# Altium PCB PCB.PcbDoc
Units mm, origin at the board's own origin, x right, y up, seen from the top; angles counter-clockwise.
Board outline 35 x 30 mm, 2 copper layers (Top Layer, Bottom Layer), stack 1.07 mm thick; 14 components, 11 nets, 48 pads, 0 vias.
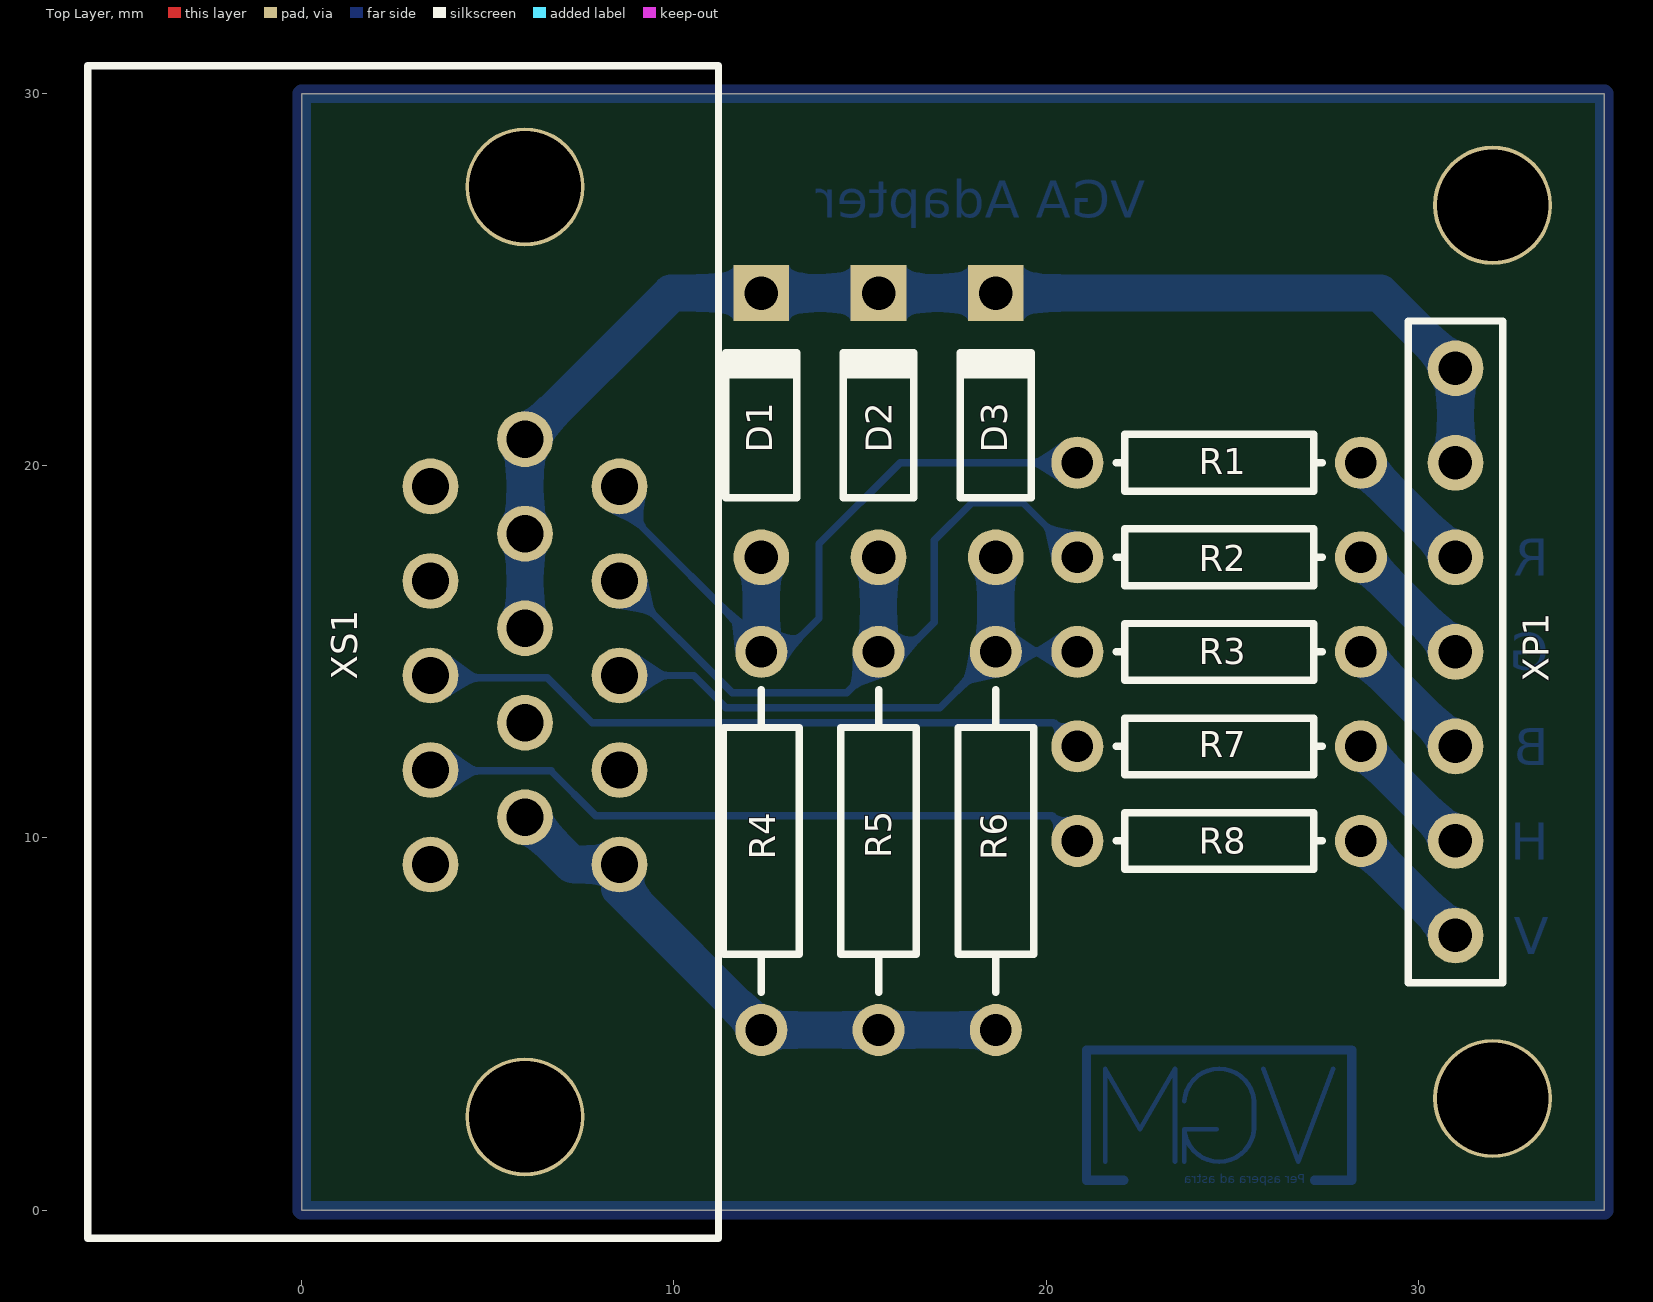
[diagram p0: Top Layer view]
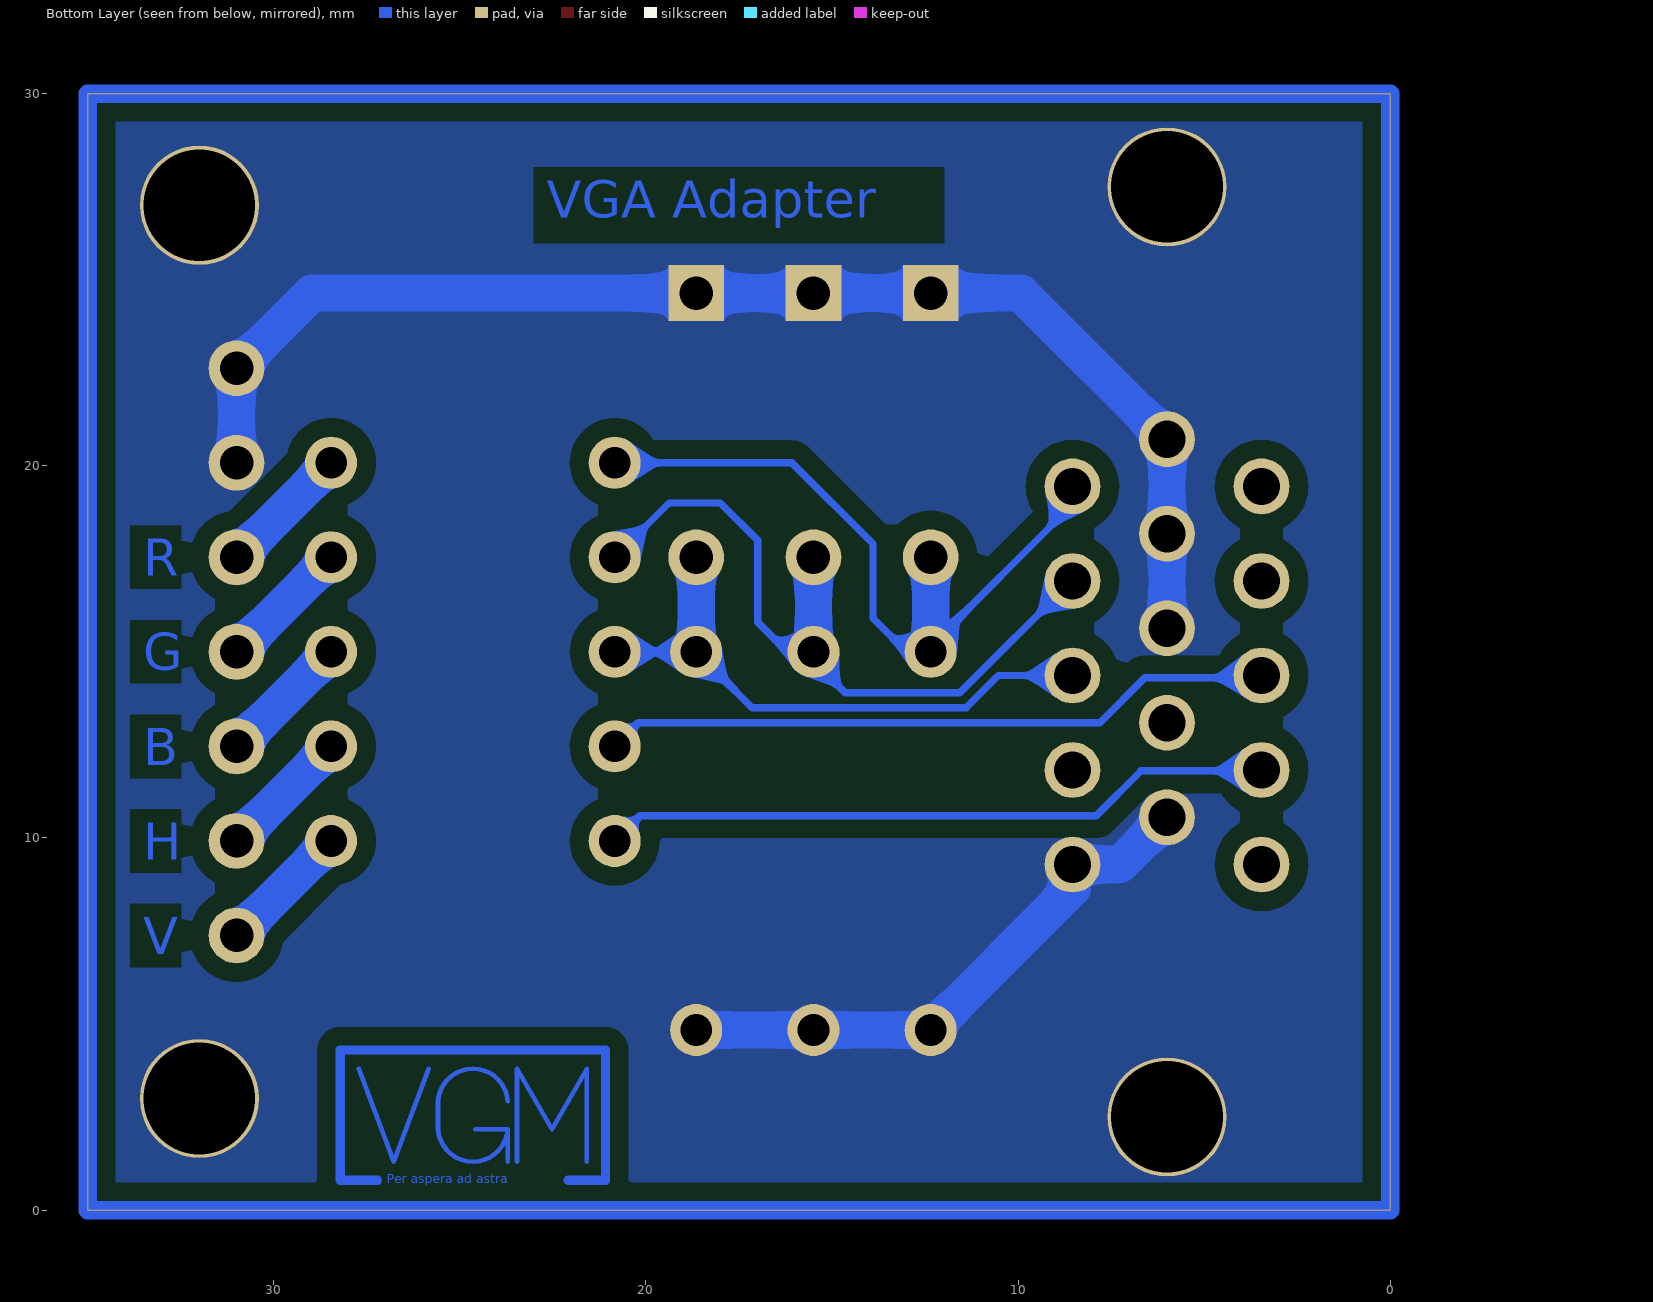
[diagram p1: Bottom Layer view, seen from below]

## Layer stack, top to bottom
Top Solder: solder mask 0.01, Solder Resist, Dk 3.5
Top Layer: signal copper 0.035
Dielectric 1: dielectric 1, FR-4, Dk 4.8
Bottom Layer: signal copper 0.035
Bottom Solder: solder mask 0.01, Solder Resist, Dk 3.5

## Board outline
0,0 35,0 35,30 0,30

## Design rules (kind name [scope] priority, off if disabled: settings)
Clearance [All] p1: gap=0.2 except(0.25: Track-THPad; 0.5: Poly-Poly THPad-Poly SMDPad-Poly Track-Poly Via-Poly Arc-Poly Fill-Poly)
PlaneClearance [All] p1: clearance=0.5
PolygonConnect [All] p1: connectstyle=Direct reliefconductorwidth=0.3 reliefentries=4 polygonreliefangle="90 Angle" airgapwidth=0.3
RoutingVias [All] p1: holewidth=1 width=1.5 viastyle="Through Hole" minholewidth=0.711 minwidth=1.27 maxholewidth=0.711 maxwidth=1.27
SolderMaskExpansion [All] p1: expansion=0.102
UnpouredPolygon [All] p1: allowunpoured=FALSE
Width [All] p1: maxlimit=1 minlimit=0.1 preferedwidth=0.2
28 further rules are at their usual default settings.

## Classes and differential pairs
component class schematic: D1 D2 D3 R1 R2 R3 R4 R5 R6 R7 R8 XP1 XS1

## Components (designator, comment, footprint, x,y, rotation, side; value= is the part's Value field where it differs from the comment)
D1 "Diode 1N4148" DO-35 12.35,21.09 r90 top
D2 "Diode 1N4148" DO-35 15.5,21.09 r90 top
D3 "Diode 1N4148" DO-35 18.65,21.09 r90 top
R1 "470" AXIAL-0.3 24.65,20.08 r180 top
R2 "470" AXIAL-0.3 24.65,17.54 r180 top
R3 "470" AXIAL-0.3 24.65,15 r180 top
R4 "75" AXIAL-0.4 12.35,9.92 r270 top
R5 "75" AXIAL-0.4 15.5,9.92 r270 top
R6 "75" AXIAL-0.4 18.65,9.92 r270 top
R7 "1K" AXIAL-0.3 24.65,12.46 r0 top
R8 "1K" AXIAL-0.3 24.65,9.92 r0 top
XP1 "Input Header" HDR1X7 31,7.38 r90 top
XS1 "D-SUB VGA" "D-SUB VGA" 6,15 r90 top
? "" "LOGO small" 28.212,0.801 r180 bottom

## Footprints (in the part's own frame and the unit in brackets; to place one, negate y for a bottom-side part, rotate by r counter-clockwise, add the part's x,y. Pads: shape width x height; smd on the part's side, far side on the other; paste and mask are expansions set on the pad)
AXIAL-0.3 [mm] "Axial Device, Thru-Hole; 2 Leads; 0.3 in Pin Spacing"
  round 1.4 hole 0.85: 1(-3.81,0) 2(3.81,0)
  silkscreen extent -2.77,-0.76 2.77,0.76
AXIAL-0.4 [mm] "Axial Device, Thru-Hole; 2 Leads; 0.4 in Pin Spacing"
  round 1.4 hole 0.85: 1(-5.08,0) 2(5.08,0)
  silkscreen extent -4.06,-1.02 4.06,1.02
"D-SUB VGA" [mm] "D-SUB VGA Female"
  round 1.5 hole 1: 1(4.445,-2.54) 2(1.905,-2.54) 3(-0.635,-2.54) 4(-3.175,-2.54) 5(-5.715,-2.54) 6(5.715,0) 7(3.175,0) 8(0.635,0) 9(-1.905,0) 10(-4.445,0) 11(4.445,2.54) 12(1.905,2.54) 13(-0.635,2.54) 14(-3.175,2.54) 15(-5.715,2.54)
  round 3.2 hole 3: ""(-12.495,0) ""(12.495,0)
  silkscreen extent -15.75,-5.2 15.75,11.75, body extent -15.42,-4.87 15.42,17.33, height 12.55
DO-35 [mm] "Diode, Axial; Body 3.8 x 1.9 mm (LxDia. max), Lead Dia. 0.53 mm (max)"
  round 1.5 hole 0.9: 1(-3.55,0)
  rect 1.5x1.5 hole 0.9: 2(3.55,0)
  silkscreen extent -1.95,-0.95 2.05,0.95
HDR1X7 [mm] "Connector; Header; 7 Position"
  round 1.5 hole 0.9: 1(0,0) 2(2.54,0) 3(5.08,0) 4(7.62,0) 5(10.16,0) 6(12.7,0) 7(15.24,0)
  silkscreen extent -1.27,-1.27 16.51,1.27
"LOGO small" [mm] "My logo (7.125x3.5)"
  Top Layer lines w0.125: 6.625,0.5 6.625,3 5.688,1.375 4.75,3 4.75,0.5 ; 4.5,0.5 4.5,1.375 ; 4.5,2.125 ccw(c3.563,2.06) 2.625,2.125 2.625,1.375 ccw(c3.563,1.44) 4.5,1.375 ; 3.625,1.375 4.5,1.375 ; 2.375,3 1.438,0.5 0.5,3
  Top Layer lines w0.25: 6.125,0 7.125,0 7.125,3.5 0,3.5 0,0 1,0

## Part data
D1 D2 D3: "High Conductance Fast Diode"
R1 R2 R3 R4 R5 R6 R7 R8: library part Res1, "Resistor"
XP1: library part "Header 7", "Header, 7-Pin"
XS1: "D-SUB VGA Female"

## Free pads (board coordinates)
  round 3.2 hole 3: ""(32,3) ""(32,27)

## Nets (pads, with @x,y where several pads share a name; then routed paths per layer and width w, separated by ;. In a path a pad name is that pad's centre, name@x,y a point inside that pad or via, vN(x,y) a via of type N, cw(c..) or ccw(c..) an arc to the next point about the centre after c; other vN are vias at no path point)
B: D3.1 R3.2 R6.1 XS1.3 | length 15.8
  Bottom Layer w0.2: XS1.3 10.535,14.365 11.4,13.5 17.15,13.5 R6.1 R3.2
  Bottom Layer w1: R6.1 D3.1
G: D2.1 R2.2 R5.1 XS1.2 | length 20.7
  Bottom Layer w0.2: XS1.2@8.54,16.46 XS1.2 8.561,16.905 11.566,13.9 14.648,13.9 15.5,14.752 R5.1 16.2,15 17,15.8 17,18 18,19 19.38,19 R2.2
  Bottom Layer w1: R5.1 D2.1
GND: D1.2 D2.2 D3.2 pad. R4.2 R5.2 R6.2 XP1.6 XP1.7 XS1. XS1.5 XS1.6 XS1.7 XS1.8 XS1.10 | length 50.2
  Bottom Layer w0.5: XS1.8@6,15.25 XS1.8
  Bottom Layer w1: XS1.10 7.27,9.285 XS1.5@7.905,9.285 ; XS1.8 XS1.6 9.925,24.64 28.98,24.64 XP1.7 XP1.6 ; XS1.5 8.54,8.65 R4.2 R6.2
HSYNC: R7.1 XS1.13 | length 18.2
  Bottom Layer w0.2: XS1.13 3.525,14.3 6.6,14.3 7.8,13.1 20.2,13.1 R7.1
NetR1_1: R1.1 XP1.5 | length 3.6
  Bottom Layer w1: R1.1 XP1.5
NetR2_1: R2.1 XP1.4 | length 3.6
  Bottom Layer w1: R2.1 XP1.4
NetR3_1: R3.1 XP1.3 | length 3.6
  Bottom Layer w1: R3.1 XP1.3
NetR7_2: R7.2 XP1.2 | length 3.6
  Bottom Layer w1: R7.2 XP1.2
NetR8_2: R8.2 XP1.1 | length 3.6
  Bottom Layer w1: R8.2 XP1.1
R: D1.1 R1.2 R4.1 XS1.1 | length 20.1
  Bottom Layer w0.2: XS1.1 8.54,18.96 12.35,15.15 R4.1 ; R4.1@12.425,15.075 12.5,15 13,15 13.9,15.9 13.9,17.9 16.08,20.08 R1.2
  Bottom Layer w1: R4.1@12.35,15.15 D1.1
VSYNC: R8.1 XS1.14 | length 18.2
  Bottom Layer w0.2: XS1.14 3.485,11.8 6.7,11.8 7.9,10.6 20.16,10.6 R8.1
pads on no net: XS1.4 XS1.9 XS1.11 XS1.12 XS1.15
copper on no net: | length 130
  Bottom Layer w0.5: 0,0 0,30 35,30 35,0 0,0

## Polygon pours and split planes (outlines as drawn)
GND on Bottom Layer "GND" (solid, remove dead copper, pour order 2): 0,0 0,30 35,30 35,0

## Other copper
Bottom Layer:
  text "VGA Adapter" at 22.665,26.667 h1
  text "R" at 33.5,17.04 h1
  text "G" at 33.5,14.5 h1
  text "B" at 33.5,11.96 h1
  text "H" at 33.5,9.42 h1
  text "V" at 33.5,6.88 h1

## Text inside footprints (layer, text, board x,y; h text height)
?: Bottom Layer "Per aspera ad astra" at 26.962,0.717 h0.25